# EAGLE board COdetector_pcb (EAGLE 7.4.0)
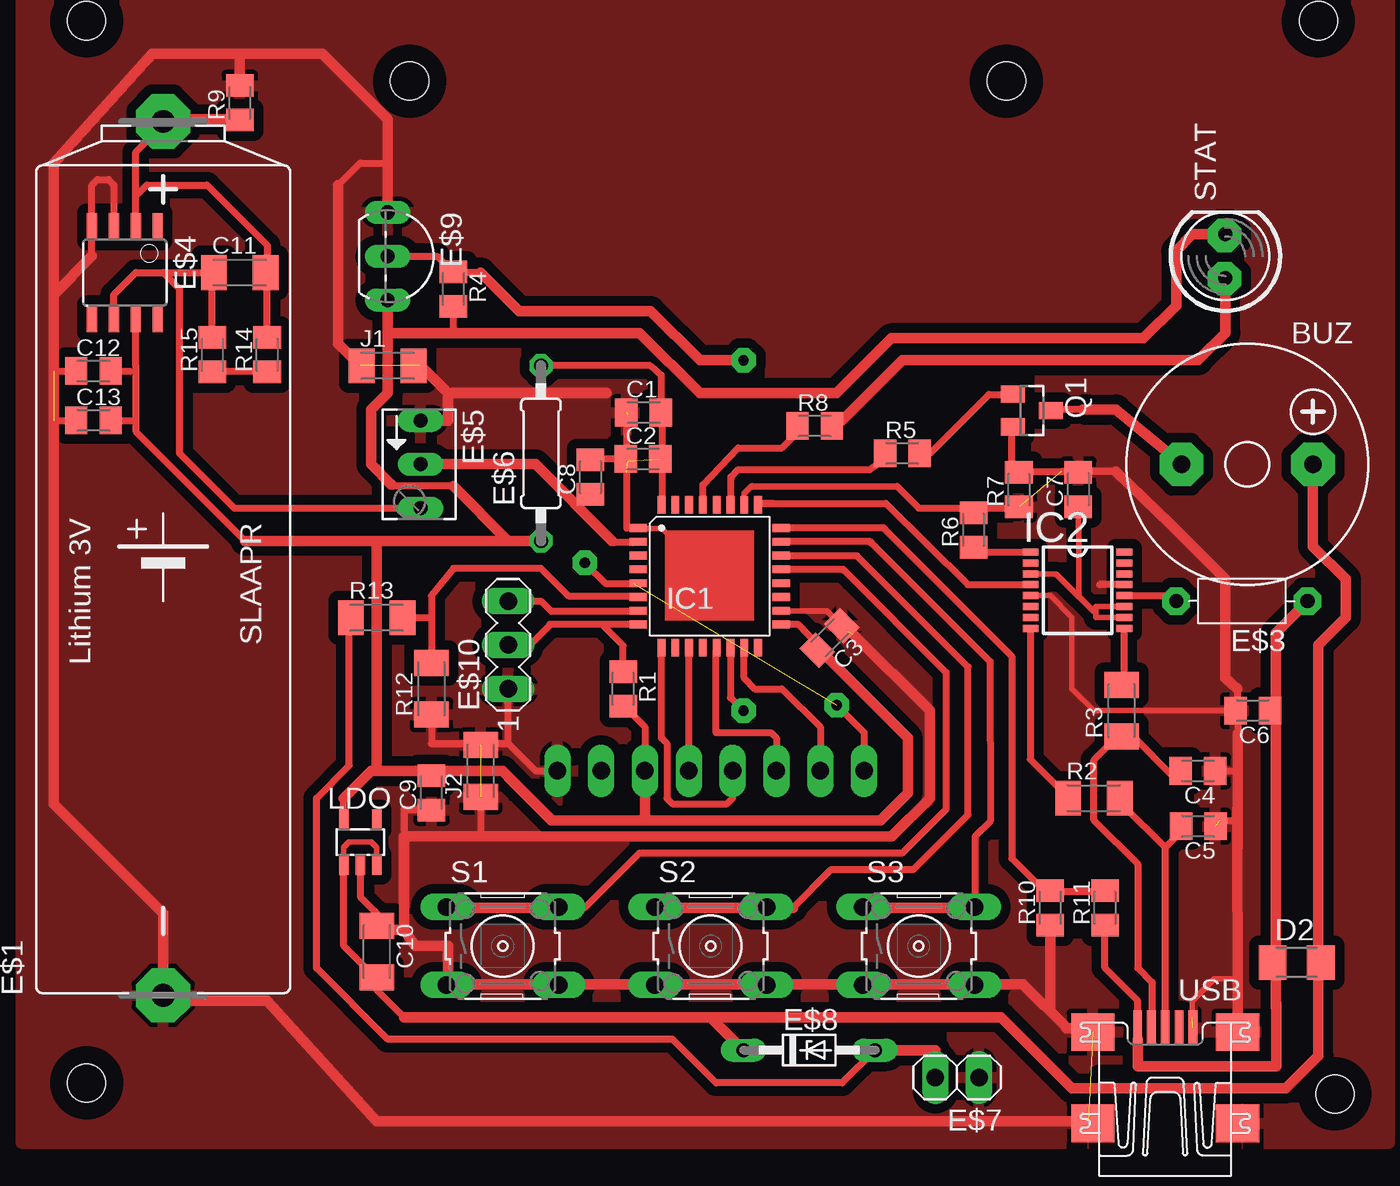
[diagram p0: board, top side]
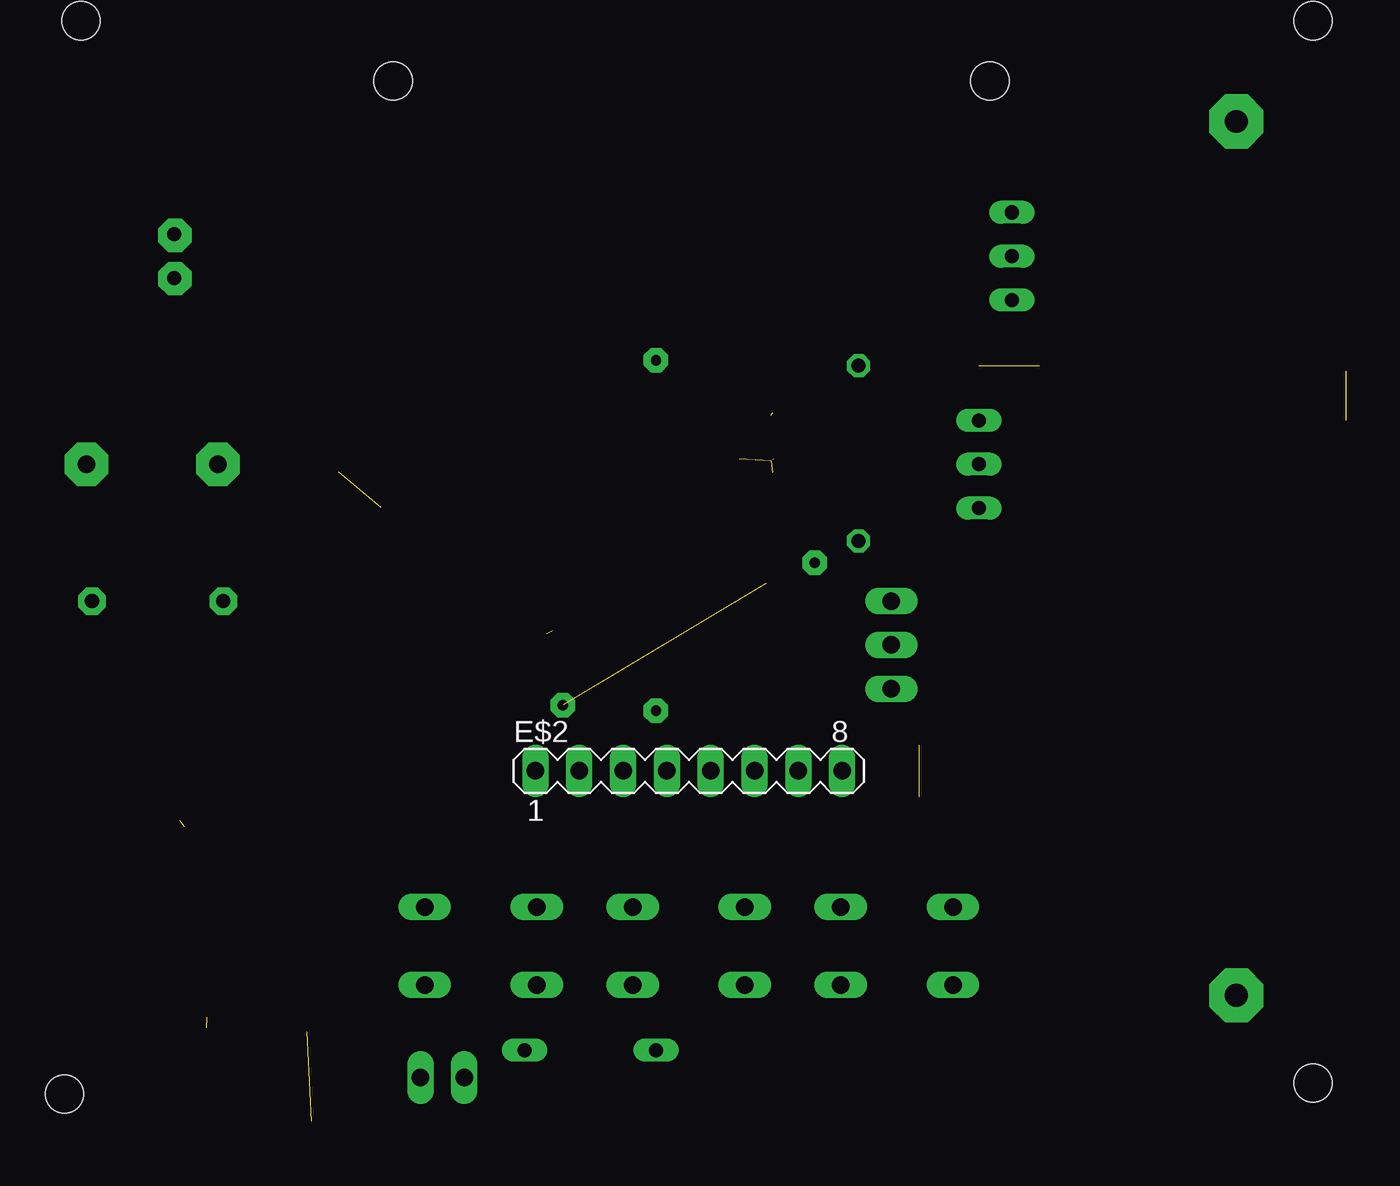
[diagram p1: board, bottom side, seen from below]

No outline drawn. Coordinates in mm, seen from the top.
Copper layers (1*16): Top 0.035mm / dielectric 1.5mm / Bottom 0.035mm
Design rules "default": minimum track width 10mil, minimum drill 24mil, track to track 8mil, track to pad 8mil, pad to pad 8mil, via to via 8mil, smd to smd 8mil, copper to edge 40mil, drill to drill 8mil, minimum pad ring 10mil, minimum via ring 8mil, stop-mask expansion 4mil, vias tented up to drill 0mil, thermal gap 10mil
Holes 2.2 mm at 22.23,61.59 56.83,61.59 3.49,3.49 3.49,65.09 74.93,65.09 75.88,2.86

## Footprints (pad centres in the part's own frame; a part is rotated, then mirrored left to right if it is on the bottom)
F/CM12P = drill 1.016 pad 2.54 octagon: + 3.81,0; - -3.81,0
C0805K = smd 1.3 x 1.6: 1 -1,0; 2 1,0
C1206K = smd 1.5 x 2: 1 -1.5,0; 2 1.5,0
M1206 = smd 1.6 x 2: 1 -1.4,0; 2 1.4,0
SL-160AA/PR = drill 1.321 pad 3.15 octagon: + 25.273,0; - -25.4,0
MA08-1 = drill 1.016 long: 1 -8.89,0; 2 -6.35,0; 3 -3.81,0; 4 -1.27,0; 5 1.27,0; 6 3.81,0; 7 6.35,0; 8 8.89,0
R-7,5 = drill 0.813 pad 1.6 octagon: 1 -3.81,0; 2 3.81,0
8S1 = smd 0.6 x 1.6: 1 -1.905,-2.654; 2 -0.645,-2.654; 3 0.625,-2.654; 4 1.895,-2.654; 5 1.905,2.654; 6 0.635,2.654; 7 -0.635,2.654; 8 -1.905,2.654
B64Y = drill 0.813 long: A 2.54,0; E -2.54,0; S 0,0
0207/10 = drill 0.813 octagon: 1 -5.08,0; 2 5.08,0
1X02 = drill 1.016 long: 1 -1.27,0; 2 1.27,0
DO34Z7 = drill 0.813 long: A 3.81,0; C -3.81,0
TO92-LINE = drill 0.813 long: 1 2.54,0; 2 0,0; 3 -2.54,0
MA03-1 = drill 1.016 long: 1 -2.54,0; 2 0,0; 3 2.54,0
VQFP32 = smd 1 x 0.45: 1 -4.15,2.8; 2 -4.15,2; 3 -4.15,1.2; 4 -4.15,0.4; 5 -4.15,-0.4; 6 -4.15,-1.2; 7 -4.15,-2; 8 -4.15,-2.8; 17 4.15,-2.8; 18 4.15,-2; 19 4.15,-1.2; 20 4.15,-0.4; 21 4.15,0.4; 22 4.15,1.2; 23 4.15,2; 24 4.15,2.8 | smd 0.45 x 1: 9 -2.8,-4.15; 10 -2,-4.15; 11 -1.2,-4.15; 12 -0.4,-4.15; 13 0.4,-4.15; 14 1.2,-4.15; 15 2,-4.15; 16 2.8,-4.15; 25 2.8,4.15; 26 2,4.15; 27 1.2,4.15; 28 0.4,4.15; 29 -0.4,4.15; 30 -1.2,4.15; 31 -2,4.15; 32 -2.8,4.15
SSOP16 = smd 0.914 x 0.406: 1 -2.718,2.223; 2 -2.718,1.587; 3 -2.718,0.953; 4 -2.718,0.318; 5 -2.718,-0.318; 6 -2.718,-0.953; 7 -2.718,-1.587; 8 -2.718,-2.223; 9 2.718,-2.223; 10 2.718,-1.587; 11 2.718,-0.953; 12 2.718,-0.318; 13 2.718,0.318; 14 2.718,0.953; 15 2.718,1.587; 16 2.718,2.223
SOT23-5 = smd 0.55 x 1.2: 1 -0.95,-1.3; 2 0,-1.3; 3 0.95,-1.3; 4 0.95,1.3; 5 -0.95,1.3
SOT23 = smd 1 x 1.4: 1 -0.95,-1.1; 2 0.95,-1.1; 3 0,1.1
B3F-10XX = drill 1.016 long: 1 -3.251,2.261; 2 3.251,2.261; 3 -3.251,-2.261; 4 3.251,-2.261
LED5MM = drill 0.813 octagon: A -1.27,0; K 1.27,0
UX60A-MB-5ST = smd 2 x 0.5: 1 2.25,1.6; 2 2.25,0.8; 3 2.25,0; 4 2.25,-0.8; 5 2.25,-1.6 | smd 2.2 x 2.5: M1 -3.3,-4.2; M2 -3.3,4.2; M3 2,4.2; M4 2,-4.2

## Placement (x,y rotation side)
BUZ  [F/CM12P]  70.8,39.37 0 top
C1  [C0805K]  35.8,42.37 0 top
C2  [C0805K]  35.76,39.68 0 top
C3  [C0805K]  46.58,29.3 225 top
C4  [C0805K]  67.94,21.59 180 top
C5  [C0805K]  67.95,18.38 180 top
C6  [C0805K]  71.12,25.08 180 top
C7  [C0805K]  61,37.91 90 top
C8  [C0805K]  32.71,38.62 90 top
C9  [C0805K]  23.5,20.32 90 top
C10  [C1206K]  20.32,11.11 270 top
C11  [C1206K]  12.38,50.48 0 top
C12  [C0805K]  3.9,44.78 0 top
C13  [C0805K]  3.9,41.92 0 top
D2  [M1206]  73.66,10.48 0 top
E$1  [SL-160AA/PR]  7.94,33.97 90 top
E$2  [MA08-1]  39.69,21.59 0 bottom
E$3  [R-7,5]  70.48,31.43 180 top
E$4  [8S1]  5.71,50.48 180 top
E$5  [B64Y]  22.86,39.37 270 top
E$6  [0207/10]  29.84,40.01 90 top
E$7  [1X02]  53.98,3.81 180 top
E$8  [DO34Z7]  45.4,5.4 0 top
E$9  [TO92-LINE]  20.95,51.44 270 top
E$10  [MA03-1]  27.94,28.89 90 top
IC1  [VQFP32]  39.63,32.88 0 top
IC2  [SSOP16]  60.96,32.07 0 top
J1  [C1206K]  20.95,45.09 0 top
J2  [C1206K]  26.35,21.59 90 top
LDO  [SOT23-5]  19.37,17.46 0 top
Q1  [SOT23]  58.31,42.49 270 top
R1  [C0805K]  34.61,26.35 270 top
R2  [C1206K]  61.91,20 0 top
R3  [C1206K]  63.5,25.08 90 top
R4  [C0805K]  24.77,49.53 270 top
R5  [C0805K]  50.8,40.01 0 top
R6  [C0805K]  54.93,35.56 90 top
R7  [C0805K]  57.55,37.9 90 top
R8  [C0805K]  45.72,41.59 0 top
R9  [C0805K]  12.38,60.32 90 top
R10  [C0805K]  59.37,13.65 90 top
R11  [C0805K]  62.55,13.65 90 top
R12  [C1206K]  23.49,26.35 90 top
R13  [C1206K]  20.32,30.48 0 top
R14  [C0805K]  13.97,45.72 90 top
R15  [C0805K]  10.79,45.72 90 top
S1  [B3F-10XX]  27.62,11.43 0 top
S2  [B3F-10XX]  39.69,11.43 0 top
S3  [B3F-10XX]  51.75,11.43 0 top
STAT  [LED5MM]  69.53,51.44 90 top
USB  [UX60A-MB-5ST]  66.04,4.45 90 top

## Library data of the parts
BUZ = buzzer
C1-C13 E$6 E$9 J1 R1 R4-R15 = ref-packages
D2 R2 = rcl
E$1 = battery
E$2 E$10 = con-lstb
E$3 = discrete
E$4 = atmel
E$5 = pot
E$7 = pinhead
E$8 = diode
IC1 = atmega-atxmega
IC2 = ftdichip
J2 R3 = ref-packages-longpad
LDO = analog-devices
Q1 = avago
S1-S3 = switch-omron
STAT = led
USB = con-hirose

## Nets
GND: C1.1 C3.1 C4.1 C5.1 C6.2 C7.2 C9.1 E$1.- E$2.8 E$5.E E$7.1 E$9.3 E$10.1 J2.1 J2.2 R7.1 R9.2 R12.1 USB.5 USB.M1 USB.M2 USB.M3 USB.M4
S$1: C2.1 C2.2
S$8: Q1.2
S$18: E$6.2
S$22: E$3.2
S$44: E$5.A
S$54: E$7.2 E$8.A
S$55: STAT.A
S$56: BUZ.-
S$57: E$2.3
S$60: S1.4
S$62: E$9.1 STAT.K
S$69: IC2.13
S$71: E$5.S
S$84: E$6.1
S$86: E$9.2
S$102: E$3.1
S$106: E$10.3
S$108: E$8.C
S$111: R10.1

## Tracks (layer width: path | path; a pad name or v marks a point on that pad's centre or on a via)
GND  (9 unrouted)
  Top 0.305: 47.59,29.72 46.44,30.86 44.09,30.86 | 58.42,31.75 59.37,31.75 60.64,30.48 60.64,26.35 61.91,25.08 70.23,25.08 | 67.63,7.3 67.63,8.26 68.9,9.53 70.17,9.53 | 70.21,19.43 70.24,17.14
  Top 0.406: 26.35,20 26.35,17.78 | 23.18,19.37 21.91,19.37 21.91,17.78 | E$2.8 29.53,21.59 27.94,23.18 | 26.35,23.18 27.94,23.18 | 60.33,6.68 61.87,6.68 | 27.94,23.18 E$10.1 | 60.64,1.27 61.59,1.27 | 3.81,51.44 3.81,52.7 | 63.18,38.94 60.01,38.94 | 63.5,32.38 62.23,32.38 | 69.22,18.73 70.17,18.73 | 68.58,21.59 70.17,21.59 | 70.23,26.34 70.23,25.08 70.25,23.76 | 70.25,17.09 70.24,17.14 70.23,19.43 | 1.59,41.91 2.86,41.91 | 1.59,44.77 2.86,44.77 | 3.81,53.66 3.81,55.56 4.13,55.88 4.76,55.88 5.08,55.56 5.08,53.66 | 18.1,55.56 19.37,56.83 20.95,56.83 | 23.5,24.77 23.5,23.18 26.04,23.18 | 34.92,42.23 34.81,42.11 34.81,38.63
  Top 0.61: 47.94,29.53 52.39,25.08 52.39,20 50.16,17.78 26.35,17.78 21.91,17.78 21.91,12.38 | 30.8,9.21 57.78,9.21 60.33,6.68 | 33.02,9.21 24.45,9.21 24.45,11.43 22.54,11.43 21.91,12.38 | 20.64,12.38 21.91,12.38 | 7.94,8.26 13.97,8.26 20.32,1.27 60.64,1.27 | E$1.- 7.94,13.34 1.59,19.68 1.59,41.91 1.59,49.21 | E$9.3 20.95,56.83 20.95,59.37 17.14,63.18 12.38,63.18 | 12.38,63.18 7.3,63.18 1.59,56.83 1.59,49.21 | 3.81,51.44 1.59,49.21 | 63.18,38.94 66.36,35.88 69.53,32.7 69.53,26.99 70.23,26.34 | 70.25,23.76 70.24,17.14 | 70.23,19.43 70.24,7.37 | 59.37,12.38 59.37,7.94 | 61.59,6.67 60.33,6.67 | 19.37,45.09 18.1,46.35 18.1,55.56 | 22.86,45.09 24.45,43.5 | 24.45,43.5 33.66,43.5 | E$5.E 24.45,41.91 24.45,43.5 | 12.38,63.18 12.38,61.59
  pour Top (isolate 0.559): 79.06,0 79.06,68.9 -0.32,68.9 -0.32,0
S$1  (3 unrouted)
  Top 0.406: 34.8,39.65 34.89,39.56 | 34.81,38.9 34.81,35.73
S$2
  Top 0.305: 41.59,29 41.63,26.96
  Top 0.406: 46.04,21.59 46.04,24.13 43.81,26.35 42.23,26.35 41.63,26.96 41.62,27 41.62,28.43
S$4
  Top 0.305: 38.44,28.45 38.44,21.61 38.43,21.61
  Top 0.406: 38.42,21.59 38.43,21.61 38.43,28.27
S$5
  Top 0.406: 36.83,28.89 36.83,23.5 37.15,23.18 37.15,20 37.47,19.68 40.64,19.68 40.96,20 40.96,21.59
S$6
  Top 0.406: 66.04,6.67 66.04,17.14 | 63.82,20 63.5,19.68 66.04,17.14 | 66.67,17.78 66.04,17.14
S$7
  Top 0.406: 30.39,30.07 29.21,28.89 27.94,28.89
S$9
  Top 0.406: 31.5,30.09 30.81,30.09
S$10
  Top 0.305: 36.01,35.66 36.91,35.66
S$11
  Top 0.305: 36.88,35.66 | 36.88,35.66 37.53,35.01
S$12
  Top 0.305: 43.5,30.8 43.5,30.86 43.49,30.87
S$13
  Top 0.305: 36.84,37.16 36.83,37.15
S$14
  Top 0.406: 30.53,30.85 35.73,30.85
S$15
  Top 0.305: 36.86,37.1 36.83,37.13
S$16
  Top 0.406: 58.21,29.86 58.21,22.25 60.3,20.16
S$17
  Top 0.305: 44.16,30.09 44.19,30.06 44.77,30.02
S$18
  Top 0.406: 36.81,42.3 36.81,44.55 36.2,45.09 E$6.2
S$20
  Top 0.406: 58.19,38.94 60.41,38.94
S$21
  Top 0.305: 42.46,37.08 49.85,37.08 54.61,32.38 58.1,32.38
S$22
  Top 0.305: 64.14,31.75 63.82,31.75
  Top 0.406: 63.82,31.75 66.36,31.75
  Top 0.61: 66.36,31.75 E$3.2
S$23
  Top 0.406: 59.69,14.61 62.23,14.61
S$24
  Top 0.305: 42.46,37.08 42.48,37.1 42.48,37.17
S$25
  Top 0.305: 60.96,36.51 61.02,36.45 61.02,35.39
S$26
  Top 0.305: 61.03,35.79 61.03,31.68 59.69,33.02 58.42,33.02
S$28
  Top 0.61: 72.46,7.87 72.46,27.56
S$29
  Top 0.406: 49.68,35.7 57.15,28.23 57.15,16.51 59.05,14.61
S$30
  Top 0.406: 21.91,7.3 20.32,8.89 20.32,9.53
S$31
  Top 0.406: 10.79,44.77 13.65,44.77
S$32
  Top 0.406: 63.18,23.5 61.91,22.23 61.91,18.73 64.45,16.19 64.45,10.16 65.27,9.34 65.27,6.93
S$33
  Top 0.406: 63.5,29.84 63.64,29.7 63.64,26.42
S$34
  Top 0.406: 36.83,41.59 36.85,41.57 36.85,37.34
S$35
  Top 0.406: 35.28,34.07 35.19,34.08
S$36
  Top 0.406: 52.39,40.01 55.8,43.42 56.97,43.42
S$37
  Top 0.406: 39.21,36.73 39.24,38.17 41.27,40.32 43.81,40.32 44.45,40.96
S$38
  Top 0.305: 35.29,30.07 35.47,30.07
  Top 0.406: 35.47,30.07 30.36,30.08
S$39
  Top 0.305: 58.1,34.29 55.56,34.29 55.56,34.61
  Top 0.406: 55.56,34.29 55.57,34.29 58.23,34.29
S$40
  Top 0.305: 44.09,35.65 44.12,35.68 49.7,35.68
S$41
  Top 0.406: 34.61,25.4 35.88,24.13 35.88,21.59 | 30.48,18.73 35.88,18.73 | 45.87,28.75 45.64,28.66
  Top 0.61: 22.86,21.59 27.62,21.59 30.48,18.73 | 27.98,21.21 30.45,18.73 35.88,18.73 | 35.88,18.73 49.53,18.73 51.12,20.32 51.12,23.5 45.87,28.75 | 35.88,18.73 35.88,21.59
S$42
  Top 0.406: 47.44,33.2 53.34,27.3 53.34,19.37 50.8,16.83 35.56,16.83 32.38,13.65 30.8,13.65
S$44
  Top 0.406: E$5.A 12.06,36.83 8.89,40.01 8.89,49.53 7.94,50.48 | 5.08,47.62 5.08,49.21 6.35,50.48 7.94,50.48 | 7.94,50.48 11.43,50.48
  Top 0.813: 23.18,36.83 E$5.A
S$46
  Top 0.406: 64.15,23.61 66.48,21.26
S$47
  Top 0.61: 24.45,13.65 30.8,13.65
S$48
  Top 0.305: 48.17,34.06 | 44.16,34.06 48.17,34.06
  Top 0.406: 44.45,13.65 46.67,15.88 51.44,15.88 54.61,19.05 54.61,27.62 48.17,34.06 43.8,34.06
  Top 0.61: 36.51,13.65 44.45,13.65
S$49
  Top 0.406: 49.01,34.8 55.88,27.94 55.89,18.66 55.01,17.78 55.01,13.65
S$51
  Top 0.305: 44.05,33.26 47.37,33.26 47.65,32.98
S$52
  Top 0.305: 44.1,34.87 48.93,34.87 49.12,34.68
S$54
  Top 0.406: E$8.A 47.31,3.49 40.01,3.49 37.47,6.03 20.95,6.03 16.83,10.16 16.83,20 18.73,21.91 18.73,30.48
  Top 0.61: E$8.A 52.7,5.4 E$7.2
S$55
  Top 0.61: 47.31,41.91 50.8,45.4 67.94,45.4 69.53,46.99 STAT.A
S$56
  Top 0.406: 61.59,42.55 59.69,42.55
  Top 0.61: 61.28,42.55 61.59,42.55 63.18,42.55 BUZ.-
S$57
  Top 0.406: 40.01,28.57 40.01,23.81 43.18,23.81 43.5,23.5 E$2.3
S$58
  Top 0.406: 26.35,50.48 25.4,50.48
  Top 0.61: 41.91,45.4 39.05,45.4 36.2,48.26 28.57,48.26 26.35,50.48
S$59
  Top 0.305: 41.63,37 41.62,37.01
S$61
  Top 0.61: 48.58,13.65 54.93,13.65
S$62
  Top 0.406: 24.77,46.99 24.77,47.94
  Top 0.61: 68.9,52.7 STAT.K 67.63,52.7 66.67,51.75 66.67,48.58 64.77,46.67 50.16,46.67 46.99,43.5 39.05,43.5 35.56,46.99 24.77,46.99 20.95,46.99 | 20.95,46.99 E$9.1 | 20.95,46.99 20.95,43.5 20,42.55 20,39.37 21.17,38.21 21.19,38.21
S$63  (via drill 0.6 pad 1.42)  (1 unrouted)
  Top 0.406: 48.58,21.59 48.58,23.81 v46.99,25.4 | v32.38,33.66 33.58,32.46 35.23,32.46
S$64
  Top 0.406: 57.15,39.37 57.15,41.27
S$65
  Top 0.406: 34.61,27.3 34.61,28.85 33.45,30.01
S$66
  Top 0.305: 63.5,31.11 62.01,31.11 62.01,30.48 63.5,30.48
S$68  (via drill 0.6 pad 1.93)
  other vias: 69.49,52.65
S$70
  Top 0.305: 40.85,37.36 40.85,37.38
  Top 0.406: 40.85,37.36 40.85,38.63 | 40.85,38.63 41.27,39.05 48.9,39.05 49.85,39.69 | 40.85,38.63 40.85,38.51
S$71
  Top 0.406: 35.18,34.82 34.08,34.82 33.97,34.92
  Top 0.61: E$5.S 29.53,39.37 33.97,34.92
S$72  (via drill 0.6 pad 1.42)
  Top 0.406: 40.83,28.55 40.83,25.85 v41.59,25.08 41.27,25.4
S$73
  Top 0.406: 18.41,15.88 18.41,11.43 20,9.84 20,9.53
S$74
  Top 0.305: 20.32,16.83 20.32,17.14 20,17.46 18.73,17.46 18.41,17.14 18.41,16.83
S$75
  Top 0.406: 34.43,39.16 34.32,39.16
S$76
  pour Top: 4.45,31.11 4.76,14.92 9.53,14.92 12.06,17.46 12.06,25.4 10.48,26.99 10.48,33.66 8.89,33.34
S$77
  Top 0.305: 35.49,33.26 35.56,33.34
S$78
  Top 0.305: 35.36,34.08 35.45,34.08
S$79
  Top 0.305: 60.98,31.76 61.94,30.8 61.97,30.8
S$80
  pour Top: 65.72,59.05 66.67,58.1 66.67,54.29
S$82
  Top 0.406: 35.27,31.7 31.48,31.7 29.84,33.34 24.77,33.34 23.5,31.75 23.5,30.48 | 23.5,30.48 23.5,28.57 | 21.91,30.48 23.5,30.48
S$83
  pour Top: 21.91,59.37 22.23,59.69 57.78,59.69 58.1,59.37 65.41,59.37 65.72,59.05 65.72,55.24 59.05,48.58 39.69,48.58 39.05,49.21 29.84,49.21 23.81,55.24 21.91,55.24 21.27,55.88 21.27,58.74
S$84
  Top 0.406: 12.7,34.92 6.35,41.27 6.35,41.91 | 6.35,47.62 6.35,45.09 6.35,41.91 | 5.08,41.91 6.35,41.91 | 24.77,38.1 21.27,38.1
  Top 0.61: E$6.1 27.94,34.92 | 27.94,34.92 24.77,38.1 | 27.94,34.92 12.7,34.92
S$85
  Top 0.305: 20.65,13.02 20.65,12.95
  Top 0.406: 19.37,15.56 19.37,14.29 20.24,13.42 20.65,13.02
S$86
  Top 0.406: E$9.2 23.81,51.44 24.77,50.48
S$87
  Top 0.406: 35.41,35.67 34.82,35.67
S$88
  Top 0.406: 6.35,53.02 6.35,54.93 | 6.35,54.93 6.35,57.47 7.94,59.05 | 6.35,54.93 6.99,55.56 10.48,55.56 13.97,52.07 13.97,51.12
  Top 0.61: 7.94,59.05 8.26,59.37 12.06,59.37
S$89
  Top 0.305: 41.63,37.24 41.63,37.68 42.05,38.1 42.1,38.09
  Top 0.406: 42.1,38.09 50.48,38.1 51.75,36.83 57.47,36.83
S$91
  Top 0.406: 5.08,44.77 6.03,44.77
S$92
  Top 0.406: 49.85,35.56 49.72,35.68 44.01,35.68
S$93
  Top 0.406: 49.21,34.61 48.94,34.88 44.08,34.88
S$94
  Top 0.406: 47.94,32.7 47.37,33.27 43.54,33.27
S$95
  Top 0.406: 46.52,28.26 44.78,30.08 44.12,30.08
S$96  (via drill 0.6 pad 1.93)
  other vias: 69.49,50.13
S$97
  Top 0.406: 10.79,47.31 10.79,49.85
S$98
  Top 0.406: 13.97,46.99 13.97,49.85
S$99
  Top 0.406: 43.32,37.08 42.7,37.1 49.84,37.1 54.59,32.39 57.95,32.39
S$100
  Top 0.61: 74.61,39.05 74.61,34.61 76.52,32.7 76.52,30.48 74.93,28.89 74.93,11.11
S$101
  Top 0.406: 18.41,19.05 18.41,20 | 20,21.59 20.32,21.91
  Top 0.61: 20.32,34.61 20.32,21.91 | 23.5,21.59 20,21.59 18.41,20
S$102
  Top 0.61: 72.46,27.37 72.46,29.59 E$3.1
S$103
  Top 0.406: 33.34,39.69 34.61,39.69
S$105  (via drill 0.6 pad 1.42)
  other vias: 41.59,45.4
S$106
  Top 0.406: E$10.3 29.84,31.43 30.44,30.85
S$108
  Top 0.61: 39.69,7.3 56.52,7.3 60.64,3.17 73.03,3.17 74.93,5.08 74.93,10.16 | 39.69,7.3 21.91,7.3 | E$8.C 39.69,7.3
S$109
  Top 0.305: 64.45,6.99 64.45,6.03
  Top 0.61: 72.39,4.45 64.45,4.45 64.45,6.03
S$110
  Top 0.61: 72.47,8.14 72.47,4.47
S$113
  Top 0.406: 64.45,7.3 64.45,8.26 62.55,10.16 62.55,12.7
(copper drawn outside any net)
  shapes: Top area x1

## Text on the board
tRestrict: CO MONITOR by A. Tyran / AGH WIEiT / Kraków 2015 | TGS5042